# Altium PCB Mixed Signal Board Project.PcbDoc (part 3 of 3)
Units mm, origin at the board's own origin, x right, y up, seen from the top; angles counter-clockwise.
Board outline 70.64 x 70.03 mm, 4 copper layers (Top Layer, GND, VCC, Bottom Layer), stack 1.565 mm thick; 188 components, 143 nets, 738 pads, 458 vias.
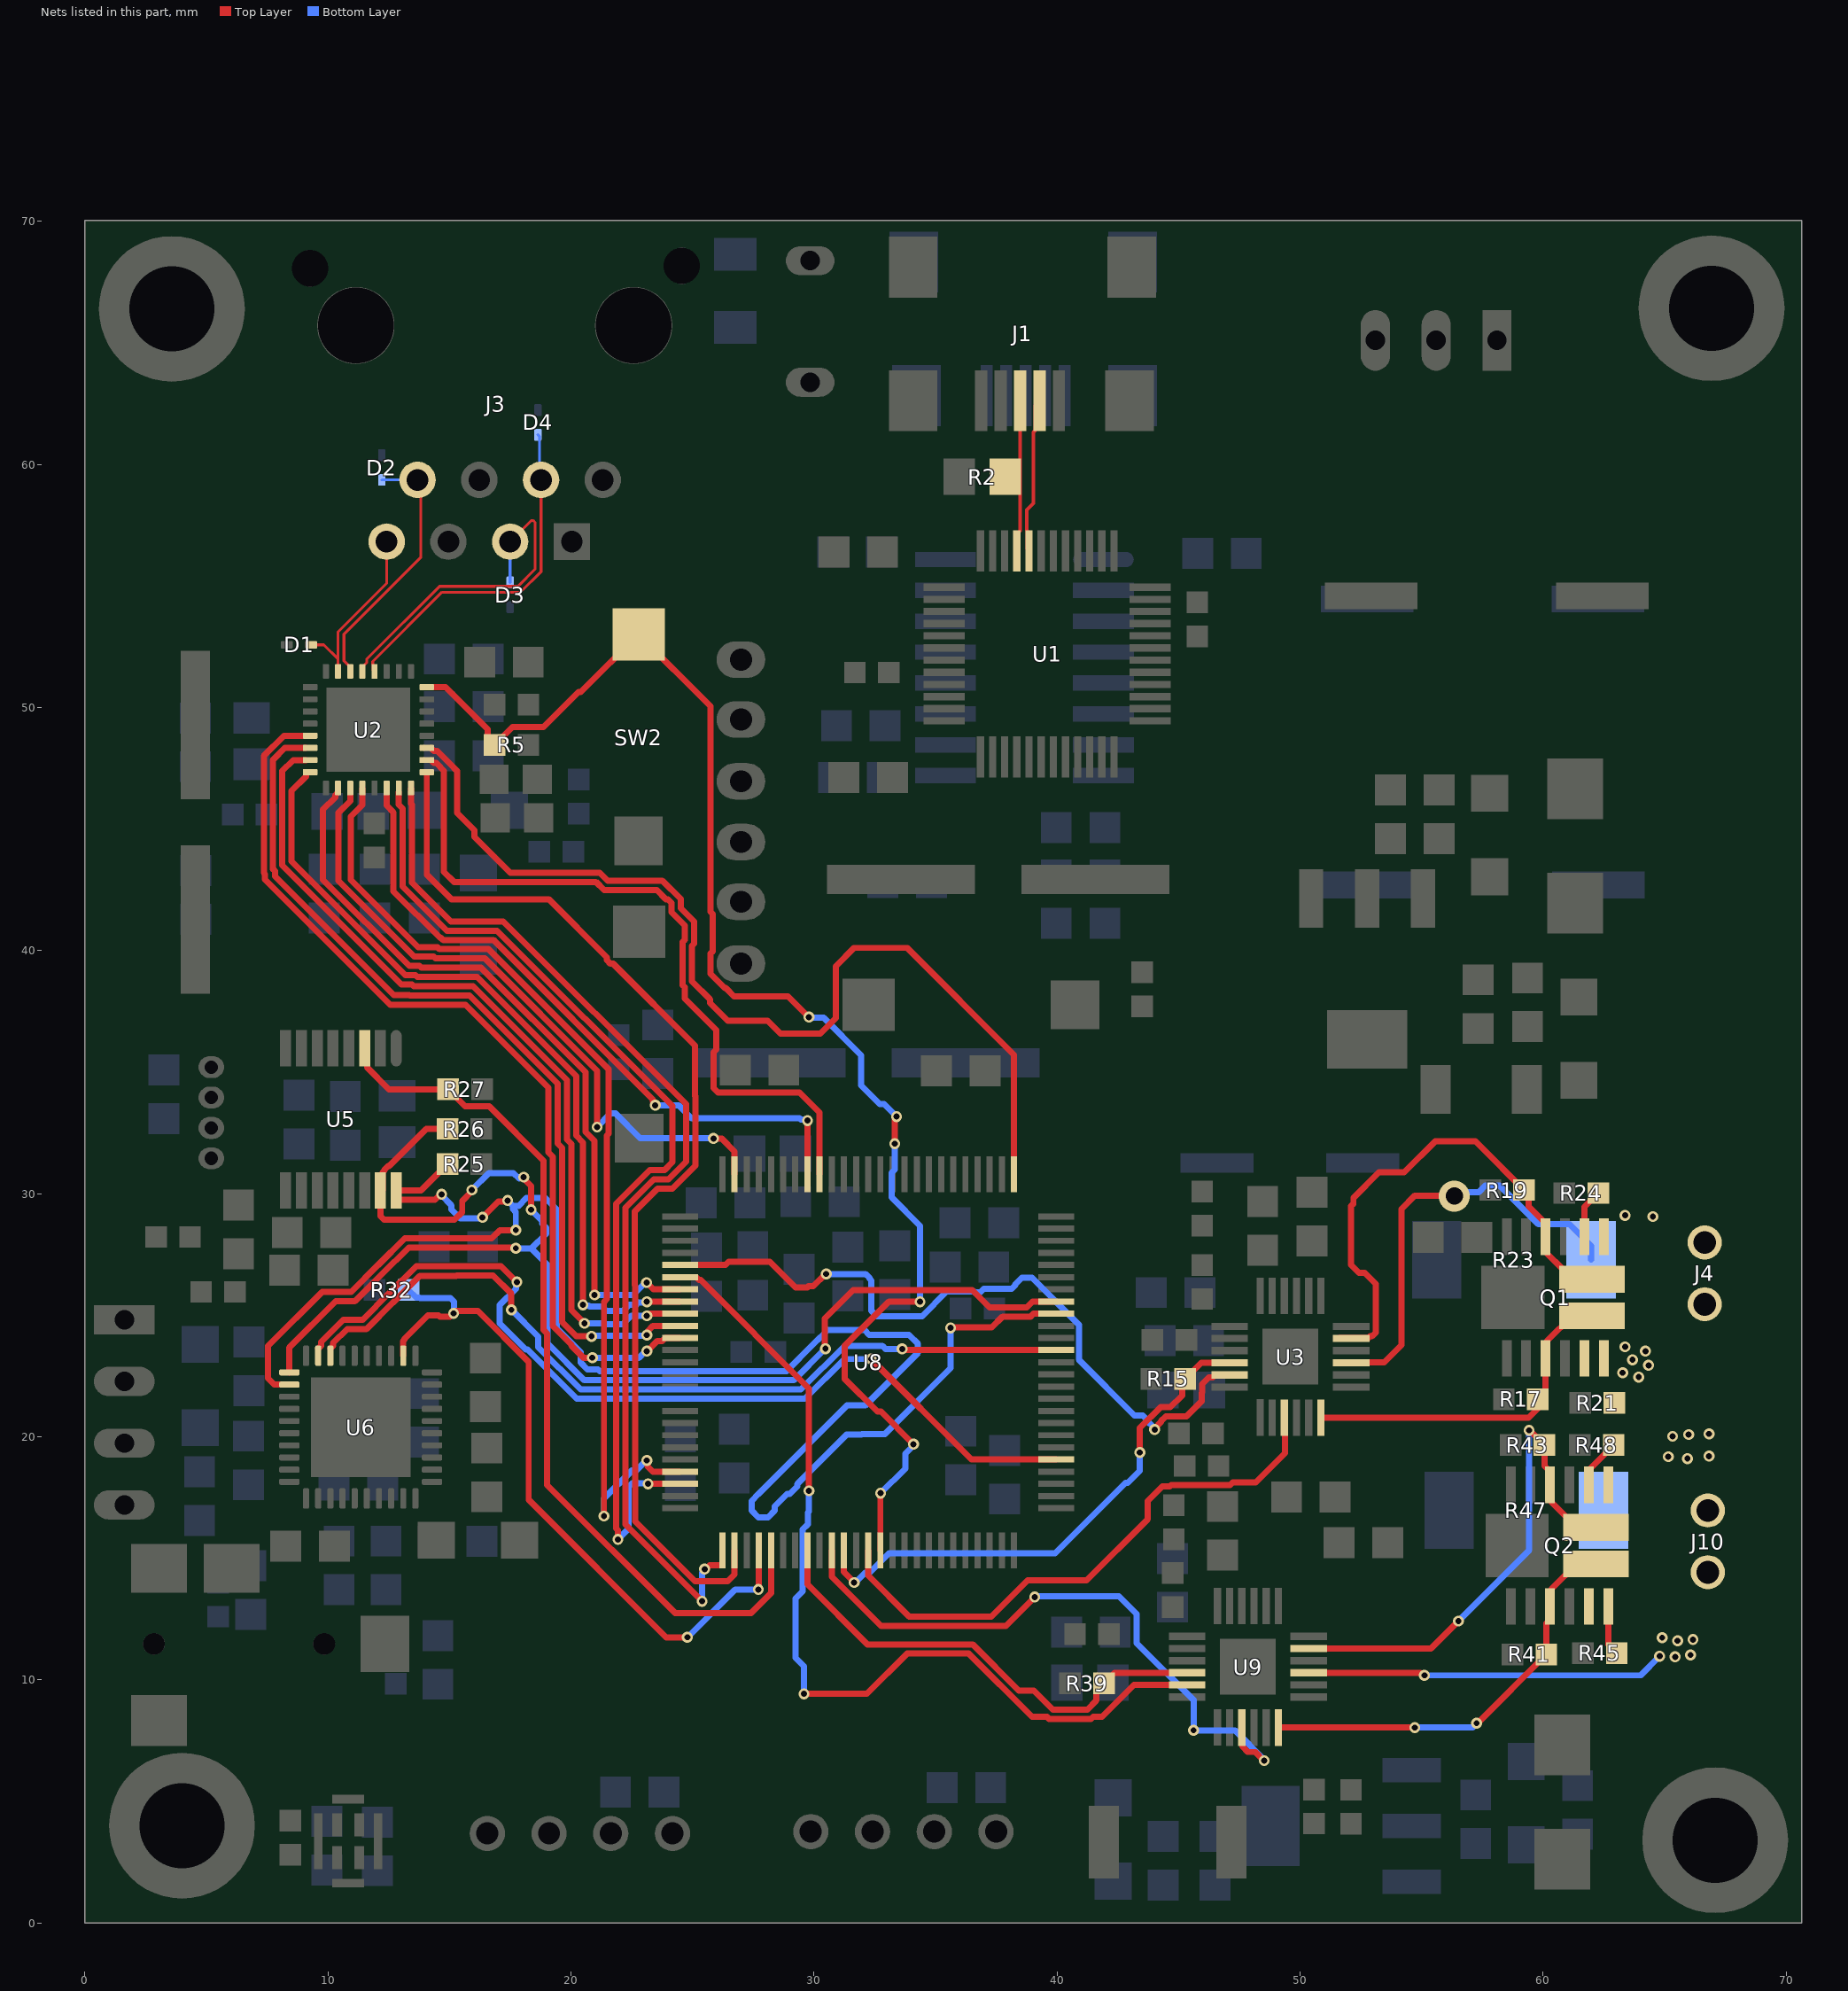
[diagram p5: the nets of this part, all layers, seen from the top]

## Via types
v1: diameter 0.45, hole 0.25, Top Layer to Bottom Layer, tented both sides, 409 vias
v2: diameter 1.27, hole 0.711, Top Layer to Bottom Layer, tented both sides, 15 vias
v3: diameter 0.45, hole 0.25, Top Layer to Bottom Layer, 14 vias
v4: diameter 0.8, hole 0.4, Top Layer to Bottom Layer, tented both sides, 10 vias
v5: diameter 0.711, hole 0.711, Top Layer to Bottom Layer, tented both sides, 9 vias
v6: diameter 1, hole 0.711, Top Layer to Bottom Layer, tented both sides, 1 vias

## Nets (pads, with @x,y where several pads share a name; then routed paths per layer and width w, separated by ;. In a path a pad name is that pad's centre, name@x,y a point inside that pad or via, vN(x,y) a via of type N, cw(c..) or ccw(c..) an arc to the next point about the centre after c; other vN are vias at no path point) (continued)
PH: U3.15 U8.63 | length 23.6
  Top Layer w0.254: U8.63@32.233,15.325 32.233,14.289 33.918,12.603 37.292,12.603 38.785,14.097 41.224,14.097 43.728,16.601 43.728,17.354 44.332,17.958 44.635,17.958 44.695,18.018 47.117,18.018 47.224,18.125 48.178,18.125 49.379,19.326 49.379,20.65 49.356,20.673 U3.15@49.356,20.788
PH_2: U8.60 U9.15 | length 26.4
  Top Layer w0.254: U8.60@30.733,15.325 30.733,14.246 32.756,12.222 37.902,12.222 v3(39.086,13.407) ; U9.15@47.604,8.037 47.627,8.014 47.627,7.255 47.848,7.033 48.155,7.033 48.512,6.677 v3(48.526,6.677)
  Bottom Layer w0.254: v3(39.086,13.407) 39.112,13.433 42.552,13.433 43.282,12.704 43.282,11.509 45.618,9.172 v3(45.618,7.925) 47.317,7.925 48.526,6.715 v3(48.526,6.677)
PHY_RESET: R5.1 SW2.2 U2.32 U8.64 | length 60.1
  Top Layer w0.254: U2.32@14.072,50.835 14.85,50.835 16.579,49.106 16.579,48.741 R5.1@16.856,48.463 17.593,49.2 18.881,49.2 20.312,50.631 20.405,50.631 SW2.2@22.784,53.01 25.746,50.047 25.746,41.589 25.83,41.505 25.83,39.964 25.746,39.88 25.746,39.049 26.334,38.461 26.373,38.461 26.713,38.12 28.936,38.12 v1(29.794,37.262) ; U8.64@32.733,15.325 32.733,17.67 v1(32.741,17.678) ; v1(33.325,32.055) 33.325,33.043 33.401,33.119 v1(33.401,33.172) ; v1(34.095,19.694) 32.755,21.034 32.616,21.034 31.274,22.376 31.274,23.745 33.081,25.552 v1(34.366,25.552)
  Bottom Layer w0.254: v1(29.794,37.262) 29.821,37.235 30.4,37.235 31.938,35.698 31.938,34.458 32.707,33.688 32.885,33.688 v1(33.401,33.172) ; v1(32.741,17.678) 33.757,18.694 33.757,19.302 34.095,19.64 v1(34.095,19.694) ; v1(33.325,32.055) 33.325,30.989 33.198,30.862 33.198,29.849 34.366,28.681 v1(34.366,25.552)
RD_N: D4.K J3.6 U2.4 | length 14.6
  Top Layer w0.116: U2.4@11.922,51.485 11.855,51.552 11.855,51.787 11.847,51.795 11.847,51.891 14.695,54.739 17.926,54.739 18.771,55.584 J3.6@18.771,59.36
  Bottom Layer w0.116: D4.K@18.644,61.217 18.707,61.154 18.707,59.423 J3.6@18.771,59.36
RD_P: D3.K J3.5 U2.5 | length 14.1
  Top Layer w0.116: U2.5@11.422,51.485 11.422,51.66 11.604,51.842 11.604,51.991 14.594,54.982 17.825,54.982 18.528,55.685 18.528,57.615 18.46,57.683 18.364,57.683 J3.5@17.501,56.82
  Bottom Layer w0.116: D3.K@17.501,55.14 J3.5@17.501,56.82
RESET: R27.2 U5.3 U8.55 | length 36.6
  Top Layer w0.254: U5.3@11.514,35.979 11.612,35.881 11.612,35.197 12.519,34.29 R27.2@14.948,34.29 15.646,33.591 16.641,33.591 18.872,31.36 18.872,24.4 19.025,24.247 19.025,18.01 24.281,12.754 27.427,12.754 28.233,13.56 U8.55@28.233,15.325
RESET_DAC: R32.1 U6.32 U8.54 | length 29.7
  Top Layer w0.254: U6.32@13.104,23.331 13.104,23.935 13.157,23.989 13.157,24.028 14.122,24.994 14.546,24.994 14.609,24.931 15.032,24.931 15.272,25.171 16.177,25.171 18.263,23.086 18.263,17.412 23.924,11.75 v1(24.79,11.75) ; v1(27.711,13.716) 27.733,13.737 U8.54@27.733,15.325
  Bottom Layer w0.254: R32.1@13.322,26.035 13.64,25.717 13.778,25.717 13.789,25.707 15.044,25.707 15.193,25.558 15.193,25.092 v1(15.174,25.073) ; v1(24.79,11.75) 26.756,13.716 v1(27.711,13.716)
RX_CLK: U2.19 U8.24 | length 27.7
  Top Layer w0.254: U2.19@10.922,46.685 10.922,46.151 10.439,45.669 10.439,42.87 13.558,39.751 14.355,39.751 14.431,39.675 16.459,39.675 21.076,35.058 v1(21.076,32.741) ; v1(25.868,32.268) 25.874,32.261 26.21,32.261 26.733,31.738 U8.24@26.733,30.801
  Bottom Layer w0.254: v1(21.076,32.741) 21.63,33.295 21.841,33.295 22.852,32.283 25.852,32.283 v1(25.868,32.268)
RX_D0: U2.16 U8.33 | length 33.2
  Top Layer w0.254: U2.16@9.272,47.335 9.101,47.335 9.099,47.333 9.099,47.162 8.509,46.572 8.509,43.668 13.188,38.989 13.612,38.989 13.688,38.913 16.138,38.913 20.216,34.835 20.216,32.384 20.494,32.106 v1(20.494,25.425) ; v1(23.123,25.553) 23.133,25.563 U8.33@24.495,25.563
  Bottom Layer w0.254: v1(20.494,25.425) 20.532,25.388 20.74,25.388 20.775,25.353 21.285,25.353 21.466,25.171 22.14,25.171 22.39,25.422 22.682,25.422 22.775,25.516 23.086,25.516 v1(23.123,25.553)
RX_D1: U2.15 U8.34 | length 34.8
  Top Layer w0.254: U2.15@9.098,47.833 8.573,47.833 8.128,47.387 8.128,43.51 13.03,38.608 13.454,38.608 13.53,38.532 15.98,38.532 19.835,34.677 19.835,32.227 20.015,32.047 20.015,25.212 v1(20.562,24.665) ; v1(23.123,24.976) 23.176,24.976 23.263,25.063 U8.34@24.495,25.063
  Bottom Layer w0.254: v1(20.562,24.665) 21.375,24.665 21.412,24.628 22.135,24.628 22.483,24.976 v1(23.123,24.976)
RX_D2: U2.14 U8.35 | length 36.8
  Top Layer w0.254: U2.14@9.099,48.333 8.226,48.333 7.747,47.854 7.747,43.353 7.823,43.276 7.823,43.058 12.715,38.166 13.357,38.166 13.372,38.151 15.823,38.151 19.454,34.519 19.454,32.069 19.634,31.889 19.634,24.715 20.22,24.13 v1(20.853,24.13) ; v1(23.123,24.181) 23.161,24.218 23.161,24.343 23.381,24.563 U8.35@24.495,24.563
  Bottom Layer w0.254: v1(20.853,24.13) 20.879,24.155 23.098,24.155 v1(23.123,24.181)
RX_D3: U2.13 U8.36 | length 38.4
  Top Layer w0.254: U2.13@9.099,48.835 8.189,48.835 7.366,48.011 7.366,43.195 7.417,43.144 7.417,42.926 12.573,37.77 15.665,37.77 19.073,34.361 19.073,31.911 ; 19.074,31.91 19.074,31.697 19.253,31.518 19.253,24.558 20.027,23.783 20.027,23.745 20.522,23.25 v1@20.882,23.25 ; v1(23.123,23.52) 23.14,23.52 23.564,23.944 23.765,23.944 23.884,24.063 U8.36@24.495,24.063
  Bottom Layer w0.254: v1(20.882,23.25) 22.8,23.25 23.07,23.52 v1(23.123,23.52)
RX_DV: U2.18 U8.32 | length 31.3
  Top Layer w0.254: U2.18@10.422,46.685 10.422,46.514 10.301,46.393 10.301,46.298 9.804,45.802 9.804,42.912 13.346,39.37 13.769,39.37 13.846,39.294 16.296,39.294 20.597,34.993 20.597,32.542 20.973,32.166 v1(20.973,25.832) ; v1(23.114,26.34) 23.391,26.063 U8.32@24.495,26.063
  Bottom Layer w0.254: v1(20.973,25.832) 22.553,25.832 23.061,26.34 v1(23.114,26.34)
RX_ER: U2.20 U8.47 | length 41.1
  Top Layer w0.254: U2.20@11.422,46.685 11.422,45.982 10.947,45.508 10.947,42.901 13.716,40.132 14.513,40.132 14.589,40.056 16.617,40.056 21.555,35.118 21.555,32.464 21.479,32.388 21.479,25.661 21.361,25.543 v1(21.361,16.739) ; v1(23.123,19.025) 23.161,18.987 23.161,18.779 23.376,18.563 U8.47@24.495,18.563
  Bottom Layer w0.254: v1(21.361,16.739) 21.361,17.459 22.509,18.606 22.685,18.606 23.103,19.025 v1(23.123,19.025)
SCL: R25.1 U5.16 U6.2 U8.92 | length 75.4
  Top Layer w0.254: U6.2@8.419,22.146 7.8,22.146 7.544,22.403 7.544,23.732 9.771,25.959 10.96,25.959 12.063,27.062 12.066,27.062 13.169,28.164 16.744,28.164 17.078,28.499 v1(17.735,28.499) ; v1(14.681,29.972) 14.628,29.972 14.404,29.748 12.912,29.748 12.814,29.846 U5.16@12.814,30.129 12.912,30.129 13.835,30.129 R25.1@14.923,31.217 ; v1(16.364,29.024) 17.02,29.68 17.361,29.68 v1(17.399,29.718) ; v1(35.62,24.476) 35.647,24.503 37.321,24.503 37.764,24.946 38.913,24.946 39.03,25.063 U8.92@39.971,25.063
  Bottom Layer w0.254: v1(14.681,29.972) 14.681,29.925 15.086,29.52 15.086,29.349 15.454,28.981 15.885,28.981 15.89,28.987 16.326,28.987 v1(16.364,29.024) ; v1(17.399,29.718) 17.617,29.5 ; v1(17.735,28.499) 17.735,29.243 17.617,29.361 17.617,29.5 ; v1(35.62,24.476) 35.62,22.818 32.918,20.117 31.984,20.117 31.957,20.09 31.347,20.09 29.315,18.058 29.315,17.957 29.001,17.643 28.9,17.643 28.394,17.136 28.394,16.965 28.113,16.685 27.716,16.685 27.436,16.965 27.436,17.362 27.716,17.643 27.722,17.643 31.365,21.285 32.113,21.285 34.281,23.453 34.281,23.828 33.912,24.197 32.269,24.197 32.082,24.384 30.557,24.384 30.274,24.101 30.273,24.101 29.993,23.82 29.993,23.819 28.878,22.704 21.187,22.704 21.12,22.771 20.684,22.771 20.403,23.051 20.403,23.488 19.424,24.467 19.424,28.062 19.436,28.074 19.436,29.328 18.949,29.816 18.166,29.816 17.849,29.5 17.617,29.5
SCLK: U6.38 U8.89 | length 34.6
  Top Layer w0.254: U6.38@10.106,23.624 10.225,23.743 10.225,23.86 10.8,24.435 11.592,24.435 12.685,25.528 12.688,25.528 13.78,26.621 15.277,26.621 15.296,26.64 16.795,26.64 17.551,25.884 v1(17.551,25.222) ; v1(33.63,23.613) 33.667,23.576 33.752,23.576 33.765,23.563 U8.89@39.971,23.563
  Bottom Layer w0.254: v1(17.551,25.222) 18.662,24.111 18.662,23.679 20.399,21.942 29.469,21.942 31.265,23.738 32.822,23.738 ; 32.822,23.711 32.852,23.711 32.95,23.613 v1(33.63,23.613)
SDA: R26.1 U5.15 U6.1 U8.93 | length 57.1
  Top Layer w0.254: U6.1@8.419,22.646 8.419,23.671 10.326,25.578 11.118,25.578 12.221,26.681 12.224,26.681 13.326,27.783 17.708,27.783 v1(17.736,27.755) ; U5.15@12.164,30.129 12.164,29.081 12.313,28.932 15.216,28.932 15.529,29.245 15.529,29.7 15.926,30.097 v1(15.926,30.15) ; U5.15@12.262,30.129 12.262,30.873 12.335,30.946 12.335,30.984 12.484,31.133 12.522,31.133 14.054,32.664 R26.1@14.923,32.664 ; v1(18.059,30.676) 18.059,30.623 18.364,30.318 v1(18.364,29.337) ; v1(30.472,23.622) 30.453,23.64 30.453,24.866 31.619,26.031 36.52,26.031 37.224,25.327 38.756,25.327 38.991,25.563 U8.93@39.971,25.563
  Bottom Layer w0.254: v1(15.926,30.15) 16.624,30.848 17.637,30.848 17.866,30.619 17.885,30.638 18.022,30.638 v1(18.059,30.676) ; v1(17.736,27.755) 17.755,27.737 18.374,27.737 18.984,28.348 18.984,28.601 18.825,28.761 18.825,28.877 v1(18.364,29.337) ; 18.372,27.737 19.043,27.065 19.043,23.837 20.557,22.323 29.165,22.323 30.464,23.622 v1(30.472,23.622)
SDIN: U6.39 U8.80 | length 38.5
  Top Layer w0.254: U6.39@9.606,23.624 9.725,23.743 9.725,23.899 10.642,24.816 11.434,24.816 12.537,25.919 12.539,25.919 13.642,27.021 17.124,27.021 v1(17.78,26.365) ; v1(32.35,23.198) 36.484,19.063 U8.80@39.971,19.063
  Bottom Layer w0.254: v1(17.78,26.365) 17.742,26.328 17.742,26.091 17.072,25.421 17.072,24.662 18.147,23.588 18.215,23.588 20.241,21.561 29.627,21.561 31.263,23.198 v1(32.35,23.198)
SH1: J4.1 Q1.3 Q1.13 R17.1 U3.18 | length 14.3
  Top Layer w0.254: U3.18@50.856,20.788 59.408,20.788 60.103,21.482 Q1.3@60.103,23.23 60.176,23.303 60.176,23.953 61.203,24.98 Q1.13@62.003,24.98
SH1_2: J10.1 Q2.3 Q2.13 R41.1 U9.18 | length 17.3
  Top Layer w0.254: U9.18@49.104,8.037 v1(54.722,8.037) ; v1(57.262,8.215) 57.3,8.215 R41.1@60.134,11.049 60.134,12.323 60.281,12.469 Q2.3@60.281,13.019 60.354,13.092 60.354,13.742 61.381,14.769 Q2.13@62.181,14.769
  Bottom Layer w0.254: v1(54.722,8.037) 57.113,8.037 57.262,8.186 v1(57.262,8.215)
SH2: J4.2 Q1.10 Q1.14 R19.1 U3.23 | length 21.9
  Top Layer w0.254: U3.23@51.585,24.042 51.608,24.065 52.807,24.065 52.88,24.138 52.961,24.138 53.11,24.287 53.11,26.291 52.658,26.743 52.422,26.743 52.095,27.07 52.095,29.489 52.197,29.591 52.197,29.82 53.25,30.873 54.283,30.873 55.567,32.156 57.213,32.156 59.41,29.96 59.41,29.473 60.03,28.853 60.03,28.303 60.176,28.157 60.176,27.53 60.78,26.926 60.78,26.903 61.203,26.48 Q1.14@62.003,26.48
SH2_2: J10.2 Q2.10 Q2.14 R43.1 U9.23 | length 21.3
  Top Layer w0.254: U9.23@50.354,11.291 55.385,11.291 v1(56.515,12.421) ; v1(59.421,20.261) 59.456,20.261 R43.1@60.058,19.66 60.058,18.792 60.281,18.569 Q2.10@60.281,18.019 60.354,17.946 60.354,17.296 61.316,16.334 62.181,16.334 Q2.14@62.181,16.269
  Bottom Layer w0.254: v1(56.515,12.421) 59.431,15.336 59.431,20.251 v1(59.421,20.261)
SNSOUT: R15.1 U3.10 U8.61 | length 22
  Top Layer w0.254: U8.61@31.233,15.325 31.233,14.437 31.654,14.015 v1(31.654,14.001) ; v1(43.409,19.355) 43.409,20.362 44.268,21.222 44.669,21.222 45.148,21.701 45.148,22.25 R15.1@45.261,22.363 ; R15.1@45.275,22.377 45.94,23.042 U3.10@47.106,23.042
  Bottom Layer w0.254: v1(31.654,14.001) 31.703,14.001 32.107,14.405 32.287,14.405 33.086,15.205 39.922,15.205 42.815,18.098 42.914,18.098 43.409,18.593 v1(43.409,19.355)
SNSOUT_2: R39.1 U8.58 U9.10 | length 20
  Top Layer w0.254: U8.58@29.733,15.325 29.733,13.93 32.202,11.46 36.526,11.46 38.432,9.554 39.053,9.554 39.831,8.776 41.246,8.776 41.618,9.148 41.618,9.538 42.371,10.291 U9.10@45.354,10.291
SO: U3.11 U8.30 | length 30.4
  Top Layer w0.254: U8.30@24.495,27.063 26.358,27.063 26.493,27.198 28.185,27.198 29.24,26.143 29.731,26.143 29.776,26.188 29.976,26.188 30.483,26.695 v1(30.505,26.695) ; v1(44.018,20.295) 44.018,20.348 44.287,20.616 44.287,20.656 44.472,20.841 45.326,20.841 45.947,21.461 45.947,21.801 45.974,21.828 45.974,22.169 46.251,22.446 46.41,22.446 46.483,22.519 47.083,22.519 U3.11@47.106,22.542
  Bottom Layer w0.254: v1(30.505,26.695) 32.125,26.695 32.283,26.537 32.283,26.499 32.36,26.423 32.36,25.184 32.585,24.959 34.45,24.959 35.463,25.971 36.58,25.971 36.607,25.944 36.85,25.944 36.991,26.086 38.138,26.086 38.287,26.235 38.287,26.273 38.552,26.538 38.973,26.538 40.899,24.612 40.899,23.17 43.188,20.881 43.534,20.881 43.683,20.732 43.683,20.683 44.018,20.348 v1(44.018,20.295)
SO_2: U8.31 U9.11 | length 38.3
  Top Layer w0.254: U8.31@24.495,26.563 25.151,26.563 25.27,26.444 25.337,26.444 29.794,21.987 v1(29.794,17.775) ; v1(29.591,9.423) 32.178,9.423 33.834,11.079 36.368,11.079 38.971,8.476 39.592,8.476 39.673,8.395 41.404,8.395 41.485,8.476 41.851,8.476 43.167,9.791 U9.11@45.354,9.791
  Bottom Layer w0.254: v1(29.591,9.423) 29.591,10.553 29.246,10.898 29.246,13.346 29.54,13.64 29.54,16.183 29.757,16.4 29.757,16.879 29.794,16.916 v1(29.794,17.775)
SP: Q1.5 Q1.6 Q1.7 Q1.8 R21.1 R23.1 R24.1 U3.21 | length 19.8
  Top Layer w0.254: U3.21@52.106,23.042 52.129,23.065 53.469,23.065 54.178,23.774 54.178,29.373 54.727,29.921 56.322,29.921 v2(56.345,29.898) ; Q1.8@61.703,28.23 61.703,29.458 R24.1@62.268,30.023
  Bottom Layer w0.254: v2(56.345,29.898) 56.513,30.065 57.353,30.065 57.614,30.326 58.211,30.326 59.797,28.74 61.087,28.74 61.976,27.851 R23.1@61.976,27.28
  other v1: 63.932,22.454 63.271,22.631 64.338,22.936 63.678,23.165 64.211,23.52 63.373,23.698 64.516,29.058 63.373,29.108
SP_2: Q2.5 Q2.6 Q2.7 Q2.8 R45.1 R47.1 R48.1 U9.21 | length 18.9
  Top Layer w0.254: U9.21@50.354,10.291 54.959,10.291 55.065,10.185 v1(55.118,10.185) ; Q2.8@61.881,18.019 61.954,18.092 61.954,18.71 R48.1@62.903,19.66 ; Q2.6@62.681,13.019 62.681,11.449 R45.1@63.03,11.1
  Bottom Layer w0.254: v1(55.118,10.185) 64.008,10.185 v1(64.795,10.973)
  other v1: 65.43,10.947 66.065,11.024 65.532,11.608 66.167,11.659 64.897,11.735 65.938,19.101 65.151,19.177 66.827,19.202 65.329,20.015 65.989,20.091 66.827,20.117
TD_N: D2.K J3.2 U2.6 | length 10.8
  Top Layer w0.116: U2.6@10.922,51.485 10.922,51.66 10.665,51.917 10.665,53.011 13.83,56.176 13.83,58.829 13.691,58.968 J3.2@13.691,59.36
  Bottom Layer w0.116: D2.K@12.217,59.363 12.22,59.36 J3.2@13.691,59.36
TD_P: D1.K J3.1 U2.7 | length 7.5
  Top Layer w0.116: D1.K@9.319,52.578 9.833,52.578 10.422,51.989 ; U2.7@10.422,51.485 10.422,51.989 ; J3.1@12.421,56.82 12.421,55.111 10.422,53.112 10.422,51.989
TX_CLK: U2.22 U8.18 | length 27.6
  Top Layer w0.254: U2.22@12.422,46.685 12.422,45.964 12.7,45.685 12.7,42.438 14.625,40.513 14.67,40.513 14.747,40.437 16.809,40.437 23.374,33.872 23.374,33.786 23.472,33.688 v1(23.472,33.635) ; U8.18@29.733,30.801 29.733,33.002 v1(29.737,33.006)
  Bottom Layer w0.254: v1(23.472,33.635) 23.479,33.629 24.44,33.629 24.966,33.103 29.404,33.103 29.463,33.044 29.699,33.044 v1(29.737,33.006)
TX_D0: U2.24 U8.51 | length 44.9
  Top Layer w0.254: U2.24@13.422,46.685 13.422,46.042 13.462,46.001 13.462,42.799 15.062,41.199 17.221,41.199 24.737,33.683 24.737,31.313 24.016,30.592 23.409,30.592 22.241,29.425 22.241,16.387 25.395,13.233 v1(25.4,13.233) ; v1(25.502,14.554) 25.555,14.554 25.715,14.715 26.233,14.715 U8.51@26.233,15.325
  Bottom Layer w0.254: v1(25.4,13.233) 25.4,14.4 25.502,14.501 v1(25.502,14.554)
TX_D1: U2.25 U8.52 | length 45.4
  Top Layer w0.254: U2.25@14.072,47.335 14.072,43.129 15.088,42.113 19.085,42.113 21.48,39.718 21.48,39.603 21.629,39.454 21.744,39.454 25.111,36.087 25.111,34.022 25.118,34.015 25.118,31.155 24.174,30.211 23.566,30.211 22.622,29.267 22.622,26.228 22.644,26.206 22.644,16.523 25.108,14.059 26.454,14.059 26.733,14.337 U8.52@26.733,15.325
TX_D2: U2.26 U8.17 | length 30.6
  Top Layer w0.254: U2.26@14.245,47.833 14.364,47.714 14.459,47.714 14.626,47.547 14.626,47.54 14.778,47.387 14.778,43.235 15.189,42.824 21.032,42.824 21.363,42.494 23.532,42.494 23.913,42.112 23.989,42.112 24.138,41.964 24.138,41.58 24.687,41.032 24.687,40.438 24.603,40.354 24.603,38.575 24.687,38.492 24.687,38.026 25.979,36.734 25.979,35.923 25.873,35.818 25.873,34.337 26.048,34.163 29.413,34.163 30.233,33.344 U8.17@30.233,30.801
TX_D3: U2.27 U8.1 | length 41.3
  Top Layer w0.254: U2.27@14.245,48.333 14.364,48.214 14.497,48.214 15.007,47.705 15.007,47.698 15.322,47.382 15.322,45.663 16.037,44.948 16.037,44.669 17.501,43.205 21.19,43.205 21.521,42.875 23.766,42.875 24.519,42.121 24.519,41.738 25.068,41.189 25.068,40.28 24.984,40.196 24.984,38.733 25.723,37.995 25.723,37.848 26.461,37.109 28.101,37.109 28.625,36.586 30.265,36.586 30.895,37.216 30.895,39.359 31.646,40.11 33.829,40.11 38.233,35.707 U8.1@38.233,30.801
TX_EN: U2.23 U8.48 | length 42.5
  Top Layer w0.254: U2.23@12.922,46.512 12.922,46.003 13.081,45.843 13.081,42.641 14.904,40.818 16.967,40.818 24.176,33.609 24.176,31.291 23.858,30.973 23.251,30.973 21.86,29.583 21.86,16.229 21.936,16.153 v1(21.936,15.776) ; v1(23.173,18.063) U8.48@24.495,18.063
  Bottom Layer w0.254: v1(21.936,15.776) 22.377,16.217 22.377,17.936 22.526,18.085 23.151,18.085 v1(23.173,18.063)
USBD_N: J1.2 U1.32 | length 6.4
  Top Layer w0.15: U1.32@38.849,56.435 38.774,56.51 38.774,57.279 38.755,57.298 38.755,58.12 39.034,58.399 39.034,61.323 39.106,61.395 39.106,62.436 J1.2@39.281,62.611
USBD_P: J1.3 R2.1 U1.33 | length 6.8
  Top Layer w0.15: R2.1@37.871,59.487 R2.1@38.481,59.487 ; U1.33@38.349,56.435 38.349,57.135 38.478,57.264 38.478,58.235 38.481,58.238 R2.1@38.481,59.487 ; J1.3@38.481,62.611 R2.1@38.481,59.487
pads on no net: J1.1 J1.4 J3. J3.3 J3.4 J3.7 J3.8 J5.1 J5.4 J7. J7.4 J12. MH2.1 MH3.1 U1.2 U1.3 U1.4 U1.10 U1.11 U1.12 U1.13 U1.14 U1.15 U1.16 U1.17 U1.19 U1.21 U1.22 U1.28 U1.29 U1.30 U1.31 U1.41 U1.42 U1.43 U1.45 U1.46 U2.30 U2.31 U4.7 U4.8 U4.9 U4.10 U4.11 U4.12 U4.13 U4.15 U5.6 U5.7 U5.8 U5.9 U6.20 U6.21 U6.22 U6.23 U6.24 U6.25 U6.26 U6.29 U6.30 U6.36 U8.2 U8.3 U8.4 U8.5 U8.7 U8.8 U8.9 U8.15 U8.38 U8.39 U8.40 U8.41 U8.42 U8.43 U8.44 U8.46 U8.67 U8.77 U8.81 U8.82 U8.83 U8.84 U8.85 U8.86 U8.87 U8.88 U8.91 U8.95 U8.96 U8.97 U8.98

## Polygon pours and split planes (outlines as drawn)
+3V3 on Bottom Layer "+3V3_L04_P087" (solid, remove dead copper, pour order 87): 24 vertices, not listed, extent 11.405,24.232 15.138,28.448
GND on Bottom Layer "GND_L04_P018" (solid, remove dead copper, pour order 18): 30.963,64.059 35.484,64.059 35.458,64.033 35.458,61.366 35.433,61.341 30.963,61.341
EARTH on Bottom Layer "EARTH_L04_P086" (solid, remove dead copper, pour order 86): 25.933,64.973 25.933,66.37 30.531,66.37 30.531,64.16 30.81,63.881 30.81,62.852 30.963,62.7 26.124,62.7 25.959,62.865 25.959,65.1
GND on Bottom Layer "GND_L04_P082" (solid, remove dead copper, pour order 82): 62.408,4.826 62.205,4.623 57.607,4.623 57.556,4.674 53.086,4.674 53.188,4.775 53.188,7.341 53.391,7.544 60.808,7.544 60.858,7.493 62.103,7.493 62.408,7.188 62.408,4.877
GND on Bottom Layer "GND_L04_P080" (solid, remove dead copper, pour order 80): 12.471,3.302 12.624,3.15 12.954,3.15 12.954,1.143 12.573,0.762 9.042,0.762 9.119,0.838 9.119,3.099 9.322,3.302
+3V3 on Bottom Layer "+3V3_L04_P077" (solid, remove dead copper, pour order 77): 7.976,3.48 7.976,3.785 7.976,4.801 14.91,4.801 14.91,3.48
+3V3 on Bottom Layer "+3V3_L04_P078" (solid, remove dead copper, pour order 78): 7.976,3.683 7.976,6.858 9.5,6.858 9.5,3.683
NetC56_2 on Bottom Layer "NETC56_2_L04_P075" (solid, remove dead copper, pour order 75): 33.198,36.119 33.274,36.043 39.395,36.043 39.395,34.798 39.37,34.773 33.223,34.773 33.147,34.696 33.147,36.093 33.172,36.119
NetC57_2 on Bottom Layer "NETC57_2_L04_P072" (solid, remove dead copper, pour order 72): 25.171,36.093 25.248,36.017 31.369,36.017 31.369,34.773 31.344,34.747 25.197,34.747 25.121,34.671 25.121,36.068 25.146,36.093
NetC67_2 on Bottom Layer "NETC67_2_L04_P071" (solid, remove dead copper, pour order 71): 22 vertices, not listed, extent 26.492,27.153 32.283,32.842
+1V8 on Bottom Layer "+1V8_L04_P068" (solid, remove dead copper, pour order 68): 23 vertices, not listed, extent 39.37,0.813 56.083,5.867
NetC90_2 on Bottom Layer "NETC90_2_L04_P067" (solid, remove dead copper, pour order 67): 62.687,1.016 62.459,1.245 62.459,4.547 56.769,4.547 56.21,3.988 56.21,2.438 55.982,2.21 52.629,2.21 52.857,1.981 52.857,0.66 52.984,0.787 62.662,0.787 62.662,1.143 62.484,1.321
GND on Bottom Layer "GND_L04_P064" (solid, remove dead copper, pour order 64): 54.331,19.558 56.947,19.558 56.947,15.443 56.871,15.367 54.94,15.367 54.737,15.57 54.737,16.358 54.331,16.764
GND on Bottom Layer "GND_L04_P062" (solid, remove dead copper, pour order 62): 48.158,31.75 48.082,31.674 43.129,31.674 43.129,29.921 43.256,29.794 43.282,29.82 44.704,29.82 44.704,30.251 45.314,30.861 48.006,30.861 48.082,30.937 48.082,31.572 48.235,31.725
+12V on Bottom Layer "+12V_L04_P060" (solid, remove dead copper, pour order 60): 53.708,32.004 53.581,31.877 50.584,31.877 50.559,31.852 49.111,31.852 49.212,31.75 49.212,29.362 49.314,29.261 51.27,29.261 51.27,30.226 51.956,30.912 53.988,30.912 53.759,31.14 53.759,31.928
SP_2 on Bottom Layer "SP_2_L04_P057" (solid, remove dead copper, pour order 57): 18 vertices, not listed, extent 61.265,10.109 67.539,20.803
+1V8 on Bottom Layer "+1V8_L04_P052" (solid, remove dead copper, pour order 52): 9.398,22.454 9.423,22.428 14.656,22.428 14.656,20.912 14.609,20.865 14.493,20.98 9.373,20.98 9.373,22.428
GND on Bottom Layer "GND_L04_P051" (solid, remove dead copper, pour order 51): 14.609,20.777 11.557,20.777 11.557,17.424 13.31,17.424 14.609,17.424
GND on Bottom Layer "GND_L04_P050" (solid, remove dead copper, pour order 50): 18.72,16.586 15.469,16.586 15.469,14.961 15.494,14.935 13.894,14.935 13.767,14.808 13.767,14.072 13.843,13.995 18.72,13.995 18.669,14.046 18.669,16.561
+3V3 on Bottom Layer "+3V3_L04_P048" (solid, remove dead copper, pour order 48): 7.442,22.631 7.366,22.555 3.556,22.555 3.556,21.184 3.556,17.628 5.969,17.628 5.969,20.93 6.096,21.057 7.696,21.057 7.544,21.209 7.544,22.657
NetC35_2 on Bottom Layer "NETC35_2_L04_P047" (solid, remove dead copper, pour order 47): 11.049,20.345 11.049,18.034 11.1,17.145 11.762,16.637 12.802,16.637 13.233,16.205 13.233,15.138 13.081,14.986 9.576,14.986 9.576,20.345
+3V3 on Bottom Layer "+3V3_L04_P045" (solid, remove dead copper, pour order 45): 10.541,29.362 9.855,29.324 9.855,31.521 9.906,31.572 9.906,32.791 10.033,32.918 13.741,32.918 13.716,32.893 13.716,29.413 13.665,29.362 11.201,29.362 11.176,29.337 10.541,29.337 10.465,29.413
GND on Bottom Layer "GND_L04_P043" (solid, remove dead copper, pour order 43): 9.881,34.95 9.957,34.874 11.709,34.874 11.709,33.147 9.881,33.147 9.881,34.9 9.931,34.95
SP on Bottom Layer "SP_L04_P042" (solid, remove dead copper, pour order 42): 60.884,29.21 60.935,29.261 64.821,29.261 64.821,20.701 62.281,20.701 62.103,20.879 62.103,23.139 60.884,24.359 60.884,29.261
GND on Bottom Layer "GND_L04_P035" (solid, remove dead copper, pour order 35): 50.825,43.383 50.902,43.459 54.889,43.459 55.042,43.307 55.042,38.481 49.886,38.481 49.759,38.354 49.759,42.672 50.571,43.485 50.952,43.485
+12V on Bottom Layer "+12V_L04_P032" (solid, remove dead copper, pour order 32): 59.588,43.866 59.639,43.917 65.557,43.917 65.507,43.866 65.507,39.878 65.38,40.005 59.639,40.005 59.639,43.866 59.588,43.917
GND on Bottom Layer "GND_L04_P029" (solid, remove dead copper, pour order 29): 50.267,55.88 55.626,55.88 56.058,55.448 56.058,52.73 55.778,52.451 55.778,52.273 55.753,52.248 50.368,52.248 50.165,52.451 50.165,55.982
+12V on Bottom Layer "+12V_L04_P027" (solid, remove dead copper, pour order 27): 59.487,57.658 65.176,57.658 65.659,57.175 65.659,51.968 64.999,51.308 59.563,51.308 58.826,52.045 58.826,56.998
GND on Bottom Layer "GND_L04_P024" (solid, remove dead copper, pour order 24): 32.334,52.4 32.156,52.222 30.328,52.222 30.023,51.918 30.023,45.466 30.099,45.39 30.099,42.037 33.782,42.037 33.782,45.39 33.325,45.39 32.004,46.711 32.004,50.317 32.258,50.571 32.258,52.476
GND on Bottom Layer "GND_L04_P023" (solid, remove dead copper, pour order 23): 40.005,64.008 46.406,64.008 46.38,63.983 46.38,61.316 46.355,61.29 40.005,61.29
GND on Bottom Layer "GND_L04_P021" (solid, remove dead copper, pour order 21): 39.675,69.469 44.171,69.469 44.171,66.751 44.145,66.726 39.675,66.726
GND on Bottom Layer "GND_L04_P017" (solid, remove dead copper, pour order 17): 32.944,66.954 32.995,67.005 32.995,69.545 33.071,69.469 37.617,69.469 37.592,69.444 37.592,66.777 37.541,66.726 32.944,66.726 32.969,66.751 32.969,67.158
GND on Bottom Layer "GND_L04_P015" (solid, remove dead copper, pour order 15): 28.651,57.404 31.115,57.404 31.521,56.998 31.521,55.22 29.667,55.22 28.651,55.22
+3V3 on Bottom Layer "+3V3_L04_P011" (solid, remove dead copper, pour order 11): 31.852,55.499 37.084,55.499 37.109,55.474 37.109,57.683 36.779,58.014 36.779,60.452 36.728,60.401 32.969,60.401 31.852,59.041 31.852,55.524
+3V3 on Bottom Layer "+3V3_L04_P009" (solid, remove dead copper, pour order 9): 40.792,49.733 40.767,42.164 40.792,42.139 38.913,42.139 38.811,42.24 38.811,49.733
GND on Bottom Layer "GND_L04_P008" (solid, remove dead copper, pour order 8): 4.089,42.189 3.785,41.885 3.785,39.573 4.699,38.659 18.186,38.659 18.212,38.633 18.212,42.189
GND on Bottom Layer "GND_L04_P007" (solid, remove dead copper, pour order 7): 15.748,44.729 15.9,44.882 18.872,44.882 19.025,45.034 19.025,49.708 19.304,49.987 19.304,55.601 17.907,54.204 17.907,53.365 16.205,53.365 15.799,52.959 15.799,44.831
+3V3 on Bottom Layer "+3V3_L04_P006" (solid, remove dead copper, pour order 6): 10.82,46.482 10.846,46.457 10.846,44.298 10.998,44.145 16.942,44.145 17.043,44.044 17.043,42.316 17.018,42.342 4.724,42.342 4.684,42.383 8.002,46.507 10.82,46.507
NetC11_2 on Bottom Layer "NETC11_2_L04_P004" (solid, remove dead copper, pour order 4): 13.471,53.075 15.697,53.205 15.697,51.867 14.834,51.003 13.308,51.003
+3V3 on Top Layer "+3V3_L01_P088" (solid, remove dead copper, pour order 88): 20 vertices, not listed, extent 8.037,3.556 10.592,5.541
NetC21_2 on Top Layer "NETC21_2_L01_P085" (solid, remove dead copper, pour order 85): 31.394,69.647 31.14,69.901 7.366,69.901 8.001,69.266 8.001,67.005 31.242,67.005 31.623,67.386 31.623,69.723 31.293,70.053
GND on Top Layer "GND_L01_P081" (solid, remove dead copper, pour order 81): 44 vertices, not listed, extent 9.042,0.559 13.056,4.521
+3V3 on Top Layer "+3V3_L01_P079" (solid, remove dead copper, pour order 79): 8.037,4.325 8.037,6.756 9.256,6.756 9.256,3.995 9.027,3.766 7.986,3.766
NetC56_2 on Top Layer "NETC56_2_L01_P074" (solid, remove dead copper, pour order 74): 32.817,35.941 36.017,35.941 36.017,34.417 32.817,34.417
NetC57_2 on Top Layer "NETC57_2_L01_P073" (solid, remove dead copper, pour order 73): 28.143,35.941 31.344,35.941 31.344,34.417 28.143,34.417
NetC67_2 on Top Layer "NETC67_2_L01_P070" (solid, remove dead copper, pour order 70): 26.619,32.969 28.524,32.969 28.524,29.921 28.397,30.048 27.559,30.048 27.584,30.074 27.584,31.267 27.584,31.445 26.619,31.445
+1V8 on Top Layer "+1V8_L01_P069" (solid, remove dead copper, pour order 69): 38.938,5.029 43.078,5.029 43.078,0.991 43.231,0.838 39.395,0.838 38.786,1.448 38.786,4.877
NetC90_2 on Top Layer "NETC90_2_L01_P066" (solid, remove dead copper, pour order 66): 62.763,1.092 62.535,1.321 62.535,4.699 56.921,4.699 56.286,4.064 56.286,2.515 56.058,2.286 52.705,2.286 52.934,2.057 52.934,0.737 53.061,0.864 62.738,0.864 62.738,1.219 62.56,1.397
+12V on Top Layer "+12V_L01_P065" (solid, remove dead copper, pour order 65): 59.474,8.707 59.524,8.656 59.524,6.116 59.55,6.091 65.583,6.091 65.583,8.834 59.474,8.834 59.499,8.834
GND on Top Layer "GND_L01_P063" (solid, remove dead copper, pour order 63): 43.396,31.699 46.723,31.699 46.825,31.598 46.825,29.794 46.698,29.667 45.25,29.667 45.225,29.642 45.225,30.531 45.174,30.582 43.497,30.582 43.218,30.861 43.218,31.496 43.396,31.674
+12V on Top Layer "+12V_L01_P061" (solid, remove dead copper, pour order 61): 60.249,16.967 55.22,16.967 55.22,14.148 60.325,14.148 60.249,14.224
+12V on Top Layer "+12V_L01_P058" (solid, remove dead copper, pour order 58): 50.571,19.38 50.571,14.605 49.657,14.605 48.87,13.818 48.87,12.344 49.073,12.141 49.505,12.141 49.657,12.294 50.419,12.294 52.07,13.945 52.883,13.945 52.883,19.38
+12V on Top Layer "+12V_L01_P059" (solid, remove dead copper, pour order 59): 53.823,32.08 53.696,31.953 50.698,31.953 50.673,31.928 49.225,31.928 49.327,31.826 49.327,29.439 49.428,29.337 51.384,29.337 51.384,30.302 52.07,30.988 54.102,30.988 53.873,31.217 53.873,32.004
SP_2 on Top Layer "SP_2_L01_P056" (solid, remove dead copper, pour order 56): 61.62,13.945 61.62,12.421 61.824,12.217 63.754,12.217 64.389,11.582 64.389,10.592 64.414,10.566 66.396,10.566 66.954,11.125 66.954,12.598 66.726,12.827 64.44,12.827 63.322,13.945 61.671,13.945 61.646,13.97
SP_2 on Top Layer "SP_2_L01_P055" (solid, remove dead copper, pour order 55): 19 vertices, not listed, extent 61.671,17.272 67.539,20.777
SH1_2 on Top Layer "SH1_2_L01_P054" (solid, remove dead copper, pour order 54): 60.96,15.24 65.329,15.24 65.557,15.469 68.377,15.469 68.377,13.36 68.072,13.36 65.049,13.36 64.313,14.097 63.525,14.097 63.367,14.256 60.867,14.256 60.833,14.29 60.833,15.367
SH2_2 on Top Layer "SH2_2_L01_P053" (solid, remove dead copper, pour order 53): 17 vertices, not listed, extent 60.782,15.672 68.428,18.313
GND on Top Layer "GND_L01_P049" (solid, remove dead copper, pour order 49): 18.72,16.561 18.694,16.535 15.469,16.535 15.469,14.935 15.494,14.91 13.894,14.91 13.767,14.783 13.767,14.046 13.843,13.97 18.72,13.97 18.694,13.995 18.694,16.548
+3V3 on Top Layer "+3V3_L01_P046" (solid, remove dead copper, pour order 46): 10.566,29.362 10.617,30.886 10.566,31.547 10.414,31.826 9.855,32.334 9.855,32.766 9.982,32.893 12.268,32.893 12.268,31.166 11.633,31.166 11.557,31.09 11.151,31.09 11.151,29.337 11.125,29.312 10.566,29.312
GND on Top Layer "GND_L01_P044" (solid, remove dead copper, pour order 44): 9.906,34.95 9.982,34.874 11.735,34.874 11.735,33.147 9.906,33.147 9.906,34.9 9.957,34.95
SP on Top Layer "SP_L01_P041" (solid, remove dead copper, pour order 41): 61.392,24.206 64.719,24.206 64.758,20.84 62.531,20.84 61.392,20.879
SP on Top Layer "SP_L01_P040" (solid, remove dead copper, pour order 40): 61.239,27.178 63.983,27.178 64.033,27.127 65.354,28.448 65.354,29.515 65.049,29.82 61.595,29.82 61.239,29.464
+12V on Top Layer "+12V_L01_P039" (solid, remove dead copper, pour order 39): 59.753,27.356 57.289,27.356 57.289,22.276 57.365,22.352 59.677,22.352 59.753,22.428
+12V on Top Layer "+12V_L01_P038" (solid, remove dead copper, pour order 38): 21 vertices, not listed, extent 57.29,22.327 60.274,29.058
SH1 on Top Layer "SH1_L01_P037" (solid, remove dead copper, pour order 37): 60.689,24.467 60.696,24.46 63.678,24.46 65.557,24.46 66.751,23.266 67.945,23.266 68.199,23.52 68.199,26.467 65.735,26.467 64.77,25.502 60.782,25.502 60.696,25.502 60.689,24.985
SH2 on Top Layer "SH2_L01_P036" (solid, remove dead copper, pour order 36): 60.78,26.926 60.981,27.127 64.033,27.127 66.04,29.134 68.072,29.134 68.072,26.746 67.945,26.619 65.38,26.619 64.745,25.984 60.731,25.984 60.63,26.086 60.63,27.076
+3V3 on Top Layer "+3V3_L01_P034" (solid, remove dead copper, pour order 34): 26 vertices, not listed, extent 50.978,31.344 62.763,43.663
no net on Top Layer "NONET_L01_P033" (solid, remove dead copper, pour order 33): 52.095,43.51 54.153,43.51 54.178,43.485
+12V on Top Layer "+12V_L01_P031" (solid, remove dead copper, pour order 31): 59.614,44.094 59.665,44.145 65.583,44.145 65.532,44.094 65.532,40.107 65.405,40.234 59.665,40.234 59.665,44.094 59.614,44.145
NetC84_2 on Top Layer "NETC84_2_L01_P030" (solid, remove dead copper, pour order 30): 63.449,47.93 51.105,47.93 49.454,46.279 49.454,39.954 51.511,39.954 51.74,40.183 51.74,45.161 62.992,45.161 63.449,45.618
GND on Top Layer "GND_L01_P028" (solid, remove dead copper, pour order 28): 50.267,55.931 55.626,55.931 56.058,55.499 56.058,52.781 55.778,52.502 55.778,52.324 55.753,52.299 50.368,52.299 50.165,52.502 50.165,56.032
+12V on Top Layer "+12V_L01_P026" (solid, remove dead copper, pour order 26): 59.512,57.785 65.202,57.785 65.684,57.302 65.684,52.095 65.024,51.435 59.588,51.435 58.852,52.172 58.852,57.125
GND on Top Layer "GND_L01_P025" (solid, remove dead copper, pour order 25): 32.207,52.172 32.106,52.273 30.226,52.273 30.226,46.203 30.353,46.076 30.404,46.126 31.979,46.126 31.979,50.394 31.953,50.419 32.41,50.876 32.41,51.765 32.207,51.968
GND on Top Layer "GND_L01_P022" (solid, remove dead copper, pour order 22): 41.91,63.957 46.431,63.957 46.406,63.932 46.406,61.265 46.38,61.239 41.91,61.239
GND on Top Layer "GND_L01_P020" (solid, remove dead copper, pour order 20): 39.675,69.469 44.171,69.469 44.145,69.444 44.145,66.777 44.12,66.751 39.675,66.751
GND on Top Layer "GND_L01_P019" (solid, remove dead copper, pour order 19): 31.166,64.11 37.236,64.11 37.236,61.392 31.166,61.392
GND on Top Layer "GND_L01_P016" (solid, remove dead copper, pour order 16): 32.944,67.031 32.995,67.081 32.995,69.621 33.071,69.545 37.617,69.545 37.592,69.52 37.592,66.853 37.541,66.802 32.944,66.802 32.969,66.827 32.969,67.234
GND on Top Layer "GND_L01_P014" (solid, remove dead copper, pour order 14): 28.727,57.531 31.191,57.531 31.598,57.125 31.598,55.347 29.743,55.347 28.727,55.347
GND on Top Layer "GND_L01_P013" (solid, remove dead copper, pour order 13): 21.057,48.362 24.384,48.362 24.384,43.256 21.234,43.256 21.133,43.155 21.057,43.231 21.057,48.387
+3V3 on Top Layer "+3V3_L01_P012" (solid, remove dead copper, pour order 12): 31.826,55.728 31.852,55.753 31.852,59.258 33.02,60.427 36.728,60.427 36.805,60.35 36.805,58.039 37.084,57.76 37.084,55.524 37.008,55.601 31.902,55.601 31.902,55.626 31.801,55.728
+3V3 on Top Layer "+3V3_L01_P010" (solid, remove dead copper, pour order 10): 40.589,49.2 39.903,49.2 38.875,50.228 39.691,51.215 41.072,49.861 41.072,46.99 40.996,46.914 40.589,46.914 40.589,47.219 40.589,46.914 40.589,47.219
NetC11_2 on Top Layer "NETC11_2_L01_P005" (solid, remove dead copper, pour order 5): 12.141,51.13 12.283,52.084 12.624,52.603 13.183,53.162 15.519,53.162 15.519,52.426 15.356,52.262 13.301,52.262 12.571,51.13
+1V8 on VCC (split plane): 277 vertices, not listed, extent 0.51,0.51 55.705,24.066
EARTH on VCC (split plane): 72 vertices, not listed, extent 0.51,61.026 70.127,69.517
+12V on VCC (split plane): 151 vertices, not listed, extent 46.611,0.51 70.127,67.317
+3V3 on VCC (split plane): 396 vertices, not listed, extent 0.51,2.854 63.548,63.105
GND on GND (split plane): 204 vertices, not listed, extent 0.51,0.51 70.127,69.517

## Keep-outs
Keep-Out Layer:
  lines w0.127: 0,0 0,70.129 70.637,70.129 70.637,0 0,0

## Other copper
GND (plane layer: these items are gaps in the copper):
  lines w0.381: 0.025,28.753 8.611,28.804 ; 0.051,7.163 13.106,7.366 13.188,15.701 17.693,16.032 17.717,25.259 13.614,25.313 ; 0.577,37.643 17.474,37.722 17.497,30.972 15.418,28.875 14.657,28.872
VCC (plane layer: these items are gaps in the copper):
  lines w0.254: -0.025,53.086 -0.025,53.365 ; 46.482,10.414 46.482,34.95 54.026,34.95 58.699,30.277 63.678,30.277 63.678,36.276 ; 49.886,61.059 50.16,61.059 50.16,59.208 ; 55.753,4.75 55.753,2.474 55.868,-0.3 ; 59.046,40.881 63.137,36.79
  lines w0.381: -0.076,28.88 8.585,28.931 ; -0.025,37.008 16.51,37.033 16.51,28.854 14.58,28.854 14.605,28.88 14.249,28.88 ; -0.025,60.858 8.458,63.246 23.139,63.297 28.372,63.271 31.572,60.833 47.32,61.011 56.388,61.163 56.744,67.335 61.925,67.513 64.897,61.163 70.409,60.985 ; 0.305,9.322 11.049,9.373 11.174,17.162 15.043,17.47 ; 7.358,7.292 13.03,7.391 13.132,15.189 17.755,15.288 17.755,26.755 15.155,26.789 ; 7.373,7.333 7.341,7.366 7.506,3.505 8.458,2.692 32.918,2.718 38.786,2.66 38.786,5.923 49.759,5.893 50.089,5.817 50.089,3.404 52.857,3.251 52.832,4.75 55.753,4.75 55.956,8.738 53.594,8.636 46.482,8.636 46.482,10.414 ; 17.628,22.657 17.628,24.131 16.505,24.131 9.017,24.262 9.017,20.523 9.088,20.452 15.129,20.452 15.043,17.47 ; 50.16,59.208 58.395,59.182 58.293,49.809 58.344,41.351 63.678,36.276 ; 15.043,17.47 15.043,17.47

## Silkscreen, mask and mechanical layers (free items; w line width, h text height)
Top Overlay:
  lines w0.254: 0.214,37.922 17.628,37.922 17.628,15.189 13.691,15.189 13.691,7.01 13.081,7.01 13.081,6.858 13.081,0.152 ; 16.822,37.472 ccw(c16.822,37.534) 16.866,37.49

## Text inside footprints (layer, text, board x,y; h text height)
D5: Top Overlay "A" at 59.191,40.548 h0.89 r90; Top Overlay "K" at 59.316,47.673 h0.89 r90
D7: Top Overlay "A" at 62.907,8.728 h0.89 r270; Top Overlay "K" at 62.782,1.603 h0.89 r270
DS1: Top Overlay "A" at 15.793,45.641 h0.51 r180; Top Overlay "K" at 20.505,45.716 h0.56 r180
DS2: Top Overlay "A" at 15.742,47.216 h0.51 r180; Top Overlay "K" at 20.454,47.291 h0.56 r180
U4: Bottom Overlay "1" at 42.748,56.592 h0.89; Bottom Overlay "8" at 42.675,45.632 h0.89; Bottom Overlay "9" at 34.781,45.755 h0.89; Bottom Overlay "16" at 35.509,56.719 h0.89
U5: Top Overlay "8" at 7.976,37.44 h0.64 r270; Top Overlay "9" at 7.98,28.968 h0.64 r270; Top Overlay "16" at 12.573,29.134 h0.64 r270; Top Overlay "1" at 12.552,37.223 h0.64 r270